# Altium PCB ConstSegmentClock - Ext DC power.PcbDoc
Units mm, origin at the board's own origin, x right, y up, seen from the top; angles counter-clockwise.
Board outline 50.8 x 20.32 mm, 2 copper layers (Component Side, Bottom Layer), stack 1.57 mm thick; 38 components, 47 nets, 133 pads, 4 vias.
Unrouted connection lines stored in the file: 67.
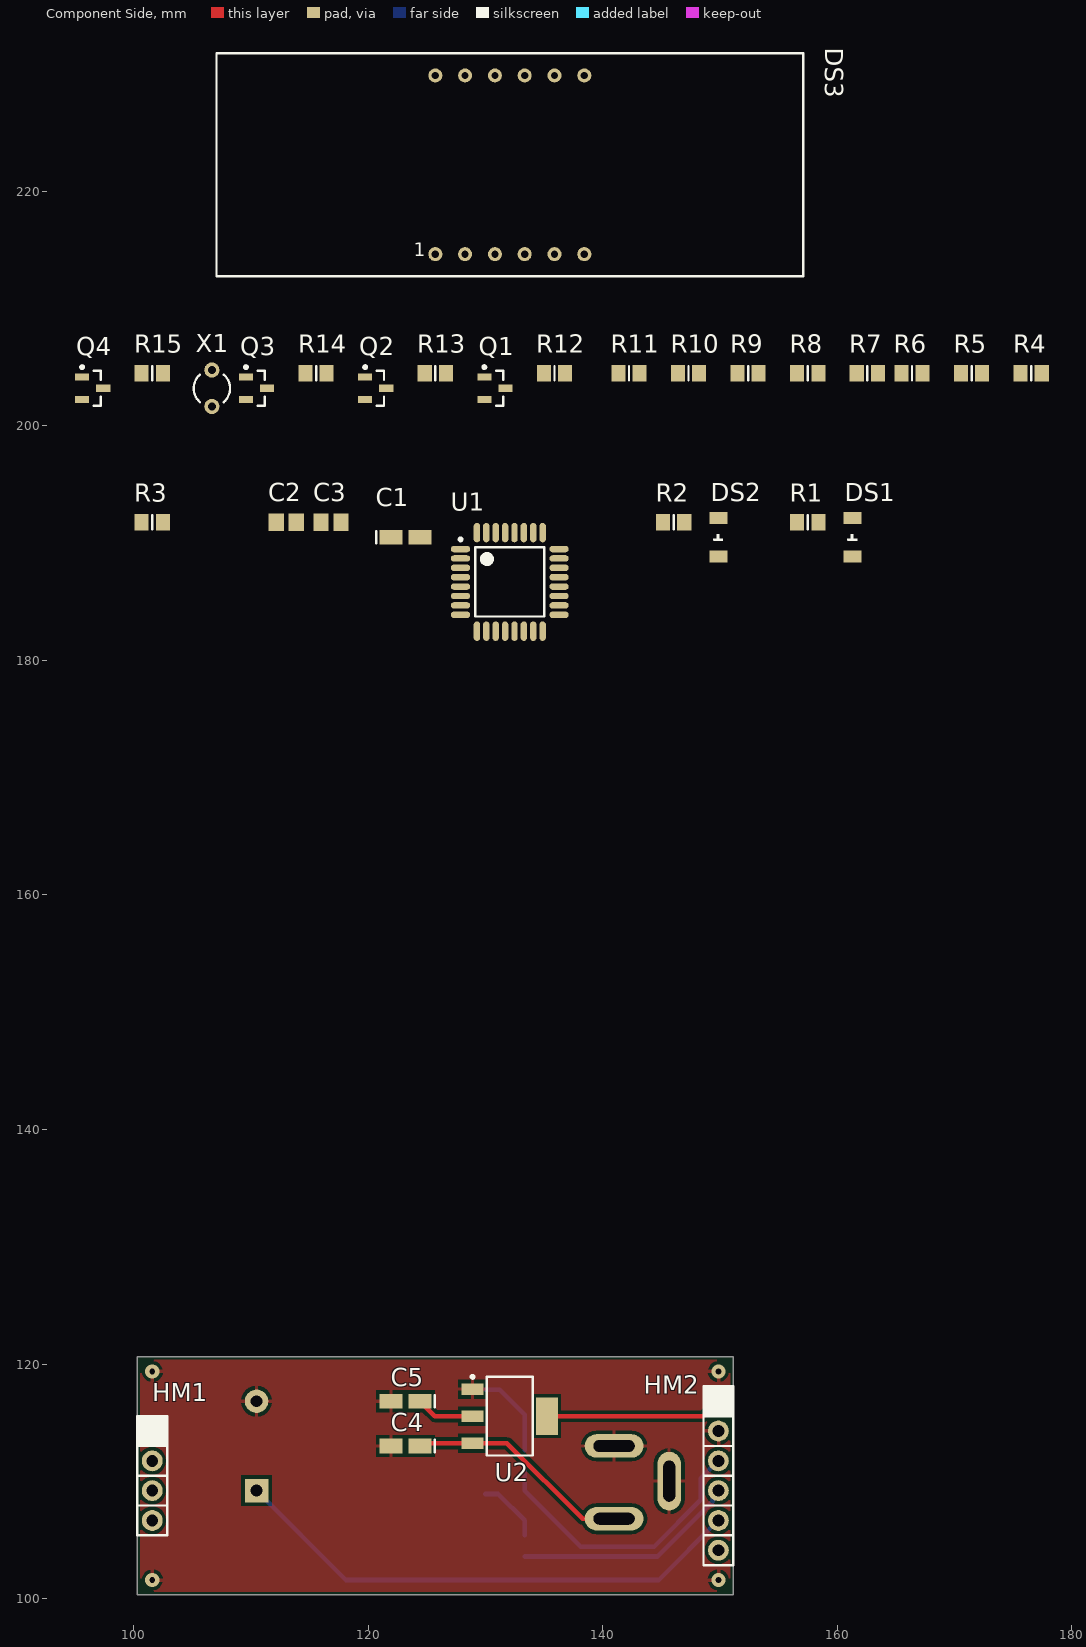
[diagram p0: Component Side view]
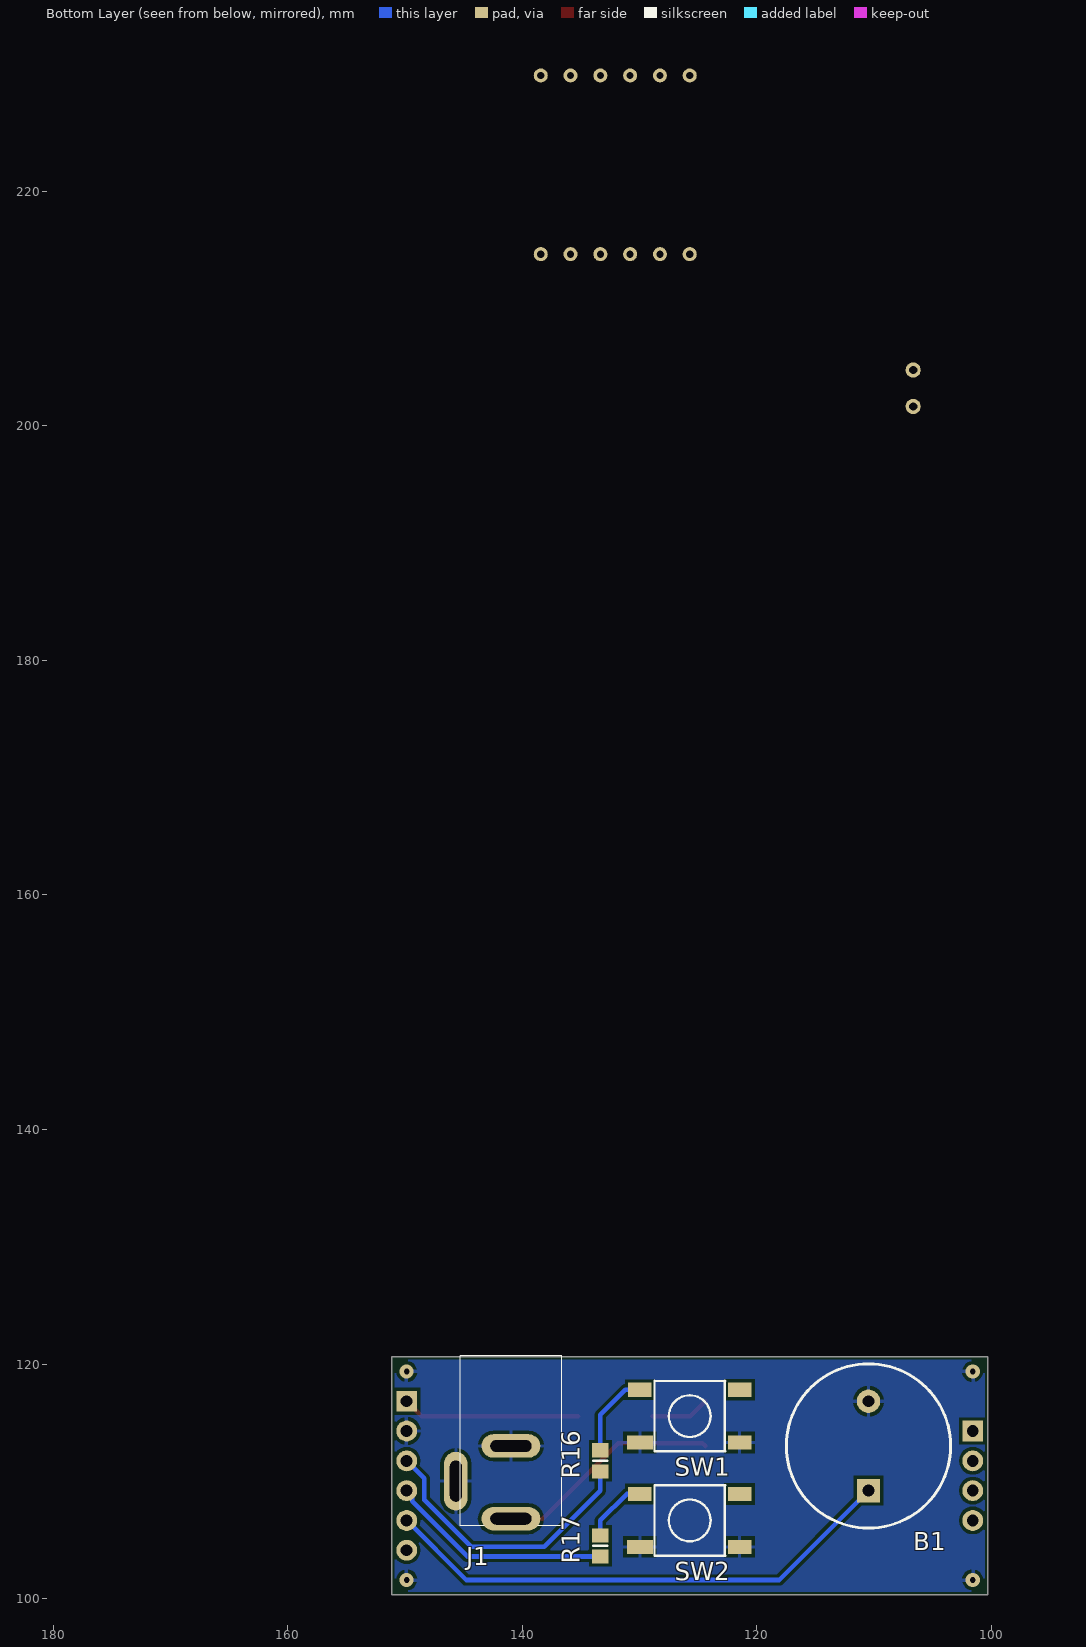
[diagram p1: Bottom Layer view, seen from below]

## Layer stack, top to bottom
Top Solder: solder mask 0.0102, Solder Resist, Dk 3.5
Component Side: signal copper 0.0356
Dielectric 1: core 1.4986, FR-4, Dk 4.2
Bottom Layer: signal copper 0.0356
Solder Side: solder mask 0.0102, Solder Resist, Dk 3.5

## Board outline
100.33,100.33 100.33,120.65 151.13,120.65 151.13,100.33

## Design rules (kind name [scope] priority, off if disabled: settings)
AcuteAngle "AcuteAngle 90" [All] p1: minimum=9.00000000000000E+0001 checktracksonly=FALSE
Clearance "Clearance 0.2" [All] p1: gap=0.3
DiffPairsRouting "DiffPairsRouting 0.2/0.2" [All] p1: maxlimit=0.2 minlimit=0.2 mostfreqgap=0.2 toplayer_minwidth=0.2 toplayer_maxwidth=0.2 toplayer_prefwidth=0.2 bottomlayer_minwidth=0.2 bottomlayer_maxwidth=0.2 bottomlayer_prefwidth=0.2 maxuncoupledlength=12.7
HoleSize "HoleSize 0.5" [All] p1: absolutevalues=TRUE maxlimit=2.54 minlimit=0.5 maxpercent=80.000 minpercent=20.000
MinimumAnnularRing "MinimumAnnularRing 0.35" [All] p1: minimumring=0.35
PlaneConnect "PlaneConnect 0.3 0.3" [All] p1: planeconnectstyle=Relief reliefexpansion=0.508 reliefentries=4 reliefconductorwidth=0.3 reliefairgap=0.3
PolygonConnect "PolygonConnect 0.3 0.3" [All] p1: connectstyle=Relief reliefconductorwidth=0.3 reliefentries=4 polygonreliefangle="90 Angle" airgapwidth=0.3
RoutingVias "RoutingVias 0.5 1.2" [All] p1: holewidth=0.5 width=1.2 viastyle="Through Hole" minholewidth=0.5 minwidth=1.2 maxholewidth=0.5 maxwidth=1.2
SMDEntry "SMDEntry Corner" [All] p1: side=FALSE corner=TRUE anyangle=FALSE
SolderMaskExpansion "SolderMaskExpansion 0.1" [All] p1: expansion=0.1
UnpouredPolygon [All] p1: allowunpoured=FALSE
Width "Width 0.2/0.3/0.4" [All] p1: maxlimit=0.4 minlimit=0.2 preferedwidth=0.3 minimp=50.000000 maximp=50.000000 favimp=50.000000
26 further rules are at their usual default settings.

## Components (designator, comment, footprint, x,y, rotation, side; value= is the part's Value field where it differs from the comment)
B1 "XCPT14A4005PX" XCPT14A4005PX 110.49,113.03 r90 bottom
C1 "4.7uF" KEMET_A 123.19,190.5 r0 top
C2 "0.1uF" CAPC2012N 113.03,191.77 r0 top
C3 "0.1uF" CAPC2012N 116.84,191.77 r0 top
C4 "10uF" KEMET_A 123.19,113.03 r180 top
C5 "10uF" KEMET_A 123.19,116.84 r180 top
DS1 "OK" LED_1206 161.29,190.5 r90 top
DS2 "LOL" LED_1206 149.86,190.5 r90 top
DS3 "FYQ-5643BUG-21" FYQ-5643BUG-21 132.08,222.25 r0 top
HM1 "68001-204HLF" HEADER-1X4 101.6,114.3 r0 top
HM2 "68001-206HLF" HEADER-1X6 149.86,116.84 r0 top
J1 "KLDX-0202" KLDX-0202 140.97,120.73 r270 bottom
Q1 "BC817" SOT23-3L 130.81,203.2 r0 top
Q2 "BC817" SOT23-3L 120.65,203.2 r0 top
Q3 "BC817" SOT23-3L 110.49,203.2 r0 top
Q4 "BC817" SOT23-3L 96.52,203.2 r0 top
R1 "270" RESC2012N 157.48,191.77 r0 top
R2 "270" RESC2012N 146.05,191.77 r0 top
R3 "10K" RESC2012N 101.6,191.77 r0 top
R4 "270" RESC2012N 176.53,204.47 r0 top
R5 "270" RESC2012N 171.45,204.47 r0 top
R6 "270" RESC2012N 166.37,204.47 r0 top
R7 "270" RESC2012N 162.56,204.47 r0 top
R8 "270" RESC2012N 157.48,204.47 r0 top
R9 "270" RESC2012N 152.4,204.47 r0 top
R10 "270" RESC2012N 147.32,204.47 r0 top
R11 "270" RESC2012N 142.24,204.47 r0 top
R12 "1K" RESC2012N 135.89,204.47 r0 top
R13 "1K" RESC2012N 125.73,204.47 r0 top
R14 "1K" RESC2012N 115.57,204.47 r0 top
R15 "1K" RESC2012N 101.6,204.47 r0 top
R16 "270" RESC2012N 133.35,111.76 r90 bottom
R17 "270" RESC2012N 133.35,104.51 r90 bottom
SW1 "KAN0641-0431B" KAN0641 125.73,115.57 r180 bottom
SW2 "KAN0641-0431B" KAN0641 125.73,106.68 r180 bottom
U1 "ATmega48PA-AU" 32A_N 132.08,186.69 r0 top
U2 "REG1117-3.3" TI-DCY4_N 132.08,115.57 r0 top
X1 "XTAL" R38 106.68,203.2 r0 top

## Footprints (in the part's own frame and the unit in brackets; to place one, negate y for a bottom-side part, rotate by r counter-clockwise, add the part's x,y. Pads: shape width x height; smd on the part's side, far side on the other; paste and mask are expansions set on the pad)
32A_N [mm] "Thin QFP, 32-Leads, Body 7x7mm, Pitch 0.8mm, IPC Medium Density"
  oval 1.65x0.55 smd: 1(-4.2,2.8) 2(-4.2,2) 3(-4.2,1.2) 4(-4.2,0.4) 5(-4.2,-0.4) 6(-4.2,-1.2) 7(-4.2,-2) 8(-4.2,-2.8) 17(4.2,-2.8) 18(4.2,-2) 19(4.2,-1.2) 20(4.2,-0.4) 21(4.2,0.4) 22(4.2,1.2) 23(4.2,2) 24(4.2,2.8)
  oval 0.55x1.65 smd: 9(-2.8,-4.2) 10(-2,-4.2) 11(-1.2,-4.2) 12(-0.4,-4.2) 13(0.4,-4.2) 14(1.2,-4.2) 15(2,-4.2) 16(2.8,-4.2) 25(2.8,4.2) 26(2,4.2) 27(1.2,4.2) 28(0.4,4.2) 29(-0.4,4.2) 30(-1.2,4.2) 31(-2,4.2) 32(-2.8,4.2)
  silkscreen extent -4.32,-2.95 2.95,3.75, body extent -3.5,-3.5 3.5,3.5, height 1.2
CAPC2012N [mm] "Chip Capacitor, Body 2.0x1.3mm, IPC Medium Density"
  rect 1.3x1.5 smd: 1(-0.85,0) 2(0.85,0)
  body extent -1.1,-0.72 1.1,0.72, height 1.1
FYQ-5643BUG-21 [mm]
  round 1.2 hole 0.61: 1(-6.35,-7.62) 2(-3.81,-7.62) 3(-1.27,-7.62) 4(1.27,-7.62) 5(3.81,-7.62) 6(6.35,-7.62) 7(6.35,7.62) 8(3.81,7.62) 9(1.27,7.62) 10(-1.27,7.62) 11(-3.81,7.62) 12(-6.35,7.62)
  silkscreen extent -25,-9.5 25.02,9.53
HEADER-1X4 [mil]
  rect 70x70 hole 40: 1(0,0)
  round 70 hole 40: 2(0,-100) 3(0,-200) 4(0,-300)
  silkscreen extent -51,-350 50,50, body extent -50,-350 50,50, height 470
HEADER-1X6 [mil]
  rect 70x70 hole 40: 1(0,0)
  round 70 hole 40: 2(0,-100) 3(0,-200) 4(0,-300) 5(0,-400) 6(0,-500)
  silkscreen extent -50,-550 50,50, body extent -50,-550 50,50, height 470
KAN0641 [mm]
  rect 2x1.2 smd: 1(-4.25,2.25) 2(4.25,2.25) 3(4.25,-2.25)
  rect 2.2x1.2 smd: 4(-4.25,-2.25)
  silkscreen extent -3,-3 3.02,3.02, body extent -5.1,-3.1 4.9,2.9, height 5.07
KEMET_A [mm] "Molded Capacitor, 2-Leads, Body 3.2x1.6mm, IPC Medium Density"
  rect 1.95x1.25 smd: 1(-1.225,0) 2(1.225,0)
  silkscreen extent -2.5,-0.53 -2.5,0.53, body extent -1.7,-0.9 1.7,0.9, height 1.8
KLDX-0202 [mm]
  oval 2x5 hole 1 slot 3.5 at 90 deg: 1(13.9,0) 2(7.7,0)
  oval 5x2 hole 1 slot 3.5 at 0 deg: 3(10.7,-4.7)
  silkscreen extent 0,-4.32 14.5,4.32, body extent -0.4,-4.7 14.8,4.7, height 11
LED_1206 [mil]
  rect 40x60 smd: 1(-64,0) 2(64,0)
  silkscreen extent -10,-16 10,16, body extent -63,-31 63,32, height 43
R38 [mm] "Crystal, Thru-Hole; 2 Leads; Body 3.1 x 8.2 mm (Dia.xH)"
  round 1.3 hole 0.7: 1(0,1.55) 2(0,-1.55)
  silkscreen extent -1.55,-1.19 1.55,1.17
RESC2012N [mm] "Chip Resistor, Body 2.0x1.3mm, IPC Medium Density"
  rect 1.2x1.4 smd: 1(-0.9,0) 2(0.9,0)
  silkscreen extent 0,-0.6 0,0.6, body extent -1.07,-0.7 1.07,0.7, height 0.65
SOT23-3L [mm] "SOT23, 3-Leads, Body 2.9x1.3mm, Pitch 0.95mm, Lead Span 2.5mm, IPC High Density"
  rect 1.2x0.6 smd: 1(-0.9,0.95) 2(-0.9,-0.95) 3(0.9,0)
  silkscreen extent -1.02,-1.5 0.7,1.92, body extent -0.7,-1.5 0.7,1.5, height 1.1
TI-DCY4_N [mm] "SOT223, 4-Leads, Body 6.5x3.5mm, Pitch 2.3mm, IPC Medium Density"
  rect 1.85x1 smd: 1(-3.175,2.3) 2(-3.175,0) 3(-3.175,-2.3)
  rect 1.85x3.2 smd: 4(3.175,0)
  silkscreen extent -3.3,-3.35 1.95,3.47, body extent -1.85,-3.35 1.85,3.35, height 1.8
XCPT14A4005PX [mm]
  rect 2x2 hole 1.016: 1(-3.81,0)
  round 2 hole 1.016: 2(3.81,0)
  silkscreen extent -7,-7 7,7, body extent -6.94,-6.99 7,6.99, height 7.2

## Part data
B1: "Piezoelectric ceramic buzzer"
C1 C4 C5: library part T491A***K***AH, "A size, STANDARD Tantalum Surface Mount Capacitors"
C2 C3: library part CGA4**X7R***********, "0805 size MULTILAYER CERAMIC CHIP CAPACITOR, General (Up to 50V)"
DS1 DS2: library part QTLP650C4TR, "Green LED, STANDARD BRIGHT 1206"
DS3: "Segment indicator"
HM1: "1x4 PIN HEADER .100\" SR STRAIGHT"
HM2: "1x6 PIN HEADER .100\" SR STRAIGHT"
J1: "Low Voltage Power Supply Connector"
Q1 Q2 Q3 Q4: "45 V, 500 mA NPN general-purpose transistors"
R1 R2 R3 R4 R5 R6 R7 R8 R9 R10 R11 R12 R13 R14 R15 R16 R17: library part ERJ6GEYJ***V, "0805 size, STANDARD thick Film Chip Resistor"
SW1 SW2: "Tact switch, button SMD"
U1: "8-bit AVR Microcontroller, 4KB Flash, 256 Bytes EEPROM, 512 Bytes SRAM, 32-pin TQFP, Industrial Grade (-40°C to 85°C)"
X1: "Crystal Oscillator"

## Via types
v1: diameter 1.2, hole 0.5, Component Side to Bottom Layer, 4 vias

## Nets (pads, with @x,y where several pads share a name; then routed paths per layer and width w, separated by ;. In a path a pad name is that pad's centre, name@x,y a point inside that pad or via, vN(x,y) a via of type N, cw(c..) or ccw(c..) an arc to the next point about the centre after c; other vN are vias at no path point)
DISP_A: R4.2 U1.30
DISP_B: R5.2 U1.31
DISP_C: R6.2 U1.32
DISP_D: R7.2 U1.1
DISP_DIGIT_0: R12.1 U1.25
DISP_DIGIT_1: R13.1 U1.26
DISP_DIGIT_2: R14.1 U1.27
DISP_DIGIT_3: R15.1 U1.28
DISP_DP: R11.2 U1.11
DISP_E: R8.2 U1.2
DISP_F: R9.2 U1.9
DISP_G: R10.2 U1.10
GND: B1.2 C1.2 C2.1 C3.1 C4.2 C5.2 HM2.2 J1.2 J1.3 Q1.2 Q2.2 Q3.2 Q4.2 R1.2 R2.2 SW1.3 SW1.4 SW2.3 SW2.4 U1.3 U1.5 U1.21 U1.22 U2.1 | length 1.7
  Bottom Layer w0.4: J1.2 J1.2@142.67,113.03
  other v1: 101.6,101.6 149.86,101.6 101.6,119.38 149.86,119.38
MCU_AIN: HM2.6 U1.19
MCU_BUTT_0: HM2.3 R16.1 U1.23 | length 24.2
  Bottom Layer w0.4: R16.1 133.35,109.22 138.14,104.43 144.373,104.43 148.371,108.428 148.371,110.271 HM2.3
MCU_BUTT_1: HM2.4 R17.1 U1.24 | length 19.7
  Bottom Layer w0.4: R17.1 144.684,103.61 149.39,108.316 149.39,108.75 HM2.4 HM2.4@149.86,108.585
MCU_BUZZ: B1.1 HM2.5 U1.14 | length 44.6
  Bottom Layer w0.4: B1.1 118.11,101.6 144.78,101.6 HM2.5
MCU_LED_0: DS1.1 U1.12
MCU_LED_1: DS2.1 U1.13
MISO: HM1.2 U1.16
MOSI: HM1.1 U1.15
N_SYS_RESET: HM1.4 R3.2 U1.29
NetC4_1: C4.1 J1.1 U2.3 | length 20.6
  Component Side w0.4: C4.1 124.655,113.27 U2.3 131.84,113.27 138.28,106.83 J1.1 J1.1@142.24,106.83
NetDS1_2: DS1.2 R1.1
NetDS2_2: DS2.2 R2.1
NetDS3_1: DS3.1 R8.1
NetDS3_2: DS3.2 R7.1
NetDS3_3: DS3.3 R11.1
NetDS3_4: DS3.4 R6.1
NetDS3_5: DS3.5 R10.1
NetDS3_6: DS3.6 Q4.3
NetDS3_7: DS3.7 R5.1
NetDS3_8: DS3.8 Q3.3
NetDS3_9: DS3.9 Q2.3
NetDS3_10: DS3.10 R9.1
NetDS3_11: DS3.11 R4.1
NetDS3_12: DS3.12 Q1.3
NetQ1_1: Q1.1 R12.2
NetQ2_1: Q2.1 R13.2
NetQ3_1: Q3.1 R14.2
NetQ4_1: Q4.1 R15.2
NetR16_2: R16.2 SW1.1 SW1.2 | length 7.3
  Bottom Layer w0.4: SW1.1 131.215,117.82 133.35,115.685 R16.2
NetR17_2: R17.2 SW2.1 SW2.2 | length 5.6
  Bottom Layer w0.4: SW2.1 131.1,108.93 133.35,106.68 R17.2
NetU1_7: U1.7 X1.2
NetU1_8: U1.8 X1.1
SCK: HM1.3 U1.17
VCC3V3: C1.1 C2.2 C3.2 C5.1 HM2.1 R3.1 U1.4 U1.6 U1.18 U1.20 U2.2 U2.4 | length 20.1
  Component Side w0.4: C5.1 125.685,115.57 U2.2 ; U2.4 148.59,115.57 HM2.1

## Polygon pours and split planes (outlines as drawn)
GND on Component Side "CSF" (solid, remove dead copper, pour order 2): 100.584,120.396 100.584,100.584 150.876,100.584 150.876,120.396
GND on Bottom Layer "BSF" (solid, remove dead copper, pour order 4): 100.584,120.396 100.584,100.584 150.876,100.584 150.876,120.396

## Silkscreen, mask and mechanical layers (free items; w line width, h text height)
Dimensions:
  lines w0.254: 23,0 32,0 30,0 31,0 33,0 ; 100,204 100,204 ; 204,100 204,100
Board Outline:
  the board outline again, w0.254

## Text inside footprints (layer, text, board x,y; h text height)
DS3: Top Overlay "1" at 123.88,214.05 h1.97